# Altium PCB PCB1.PcbDoc
Units mm, origin at the board's own origin, x right, y up, seen from the top; angles counter-clockwise.
Board outline 128.4 x 73.28 mm, 2 copper layers (Top Layer, Bottom Layer); 38 components, 48 nets, 144 pads, 2 vias.
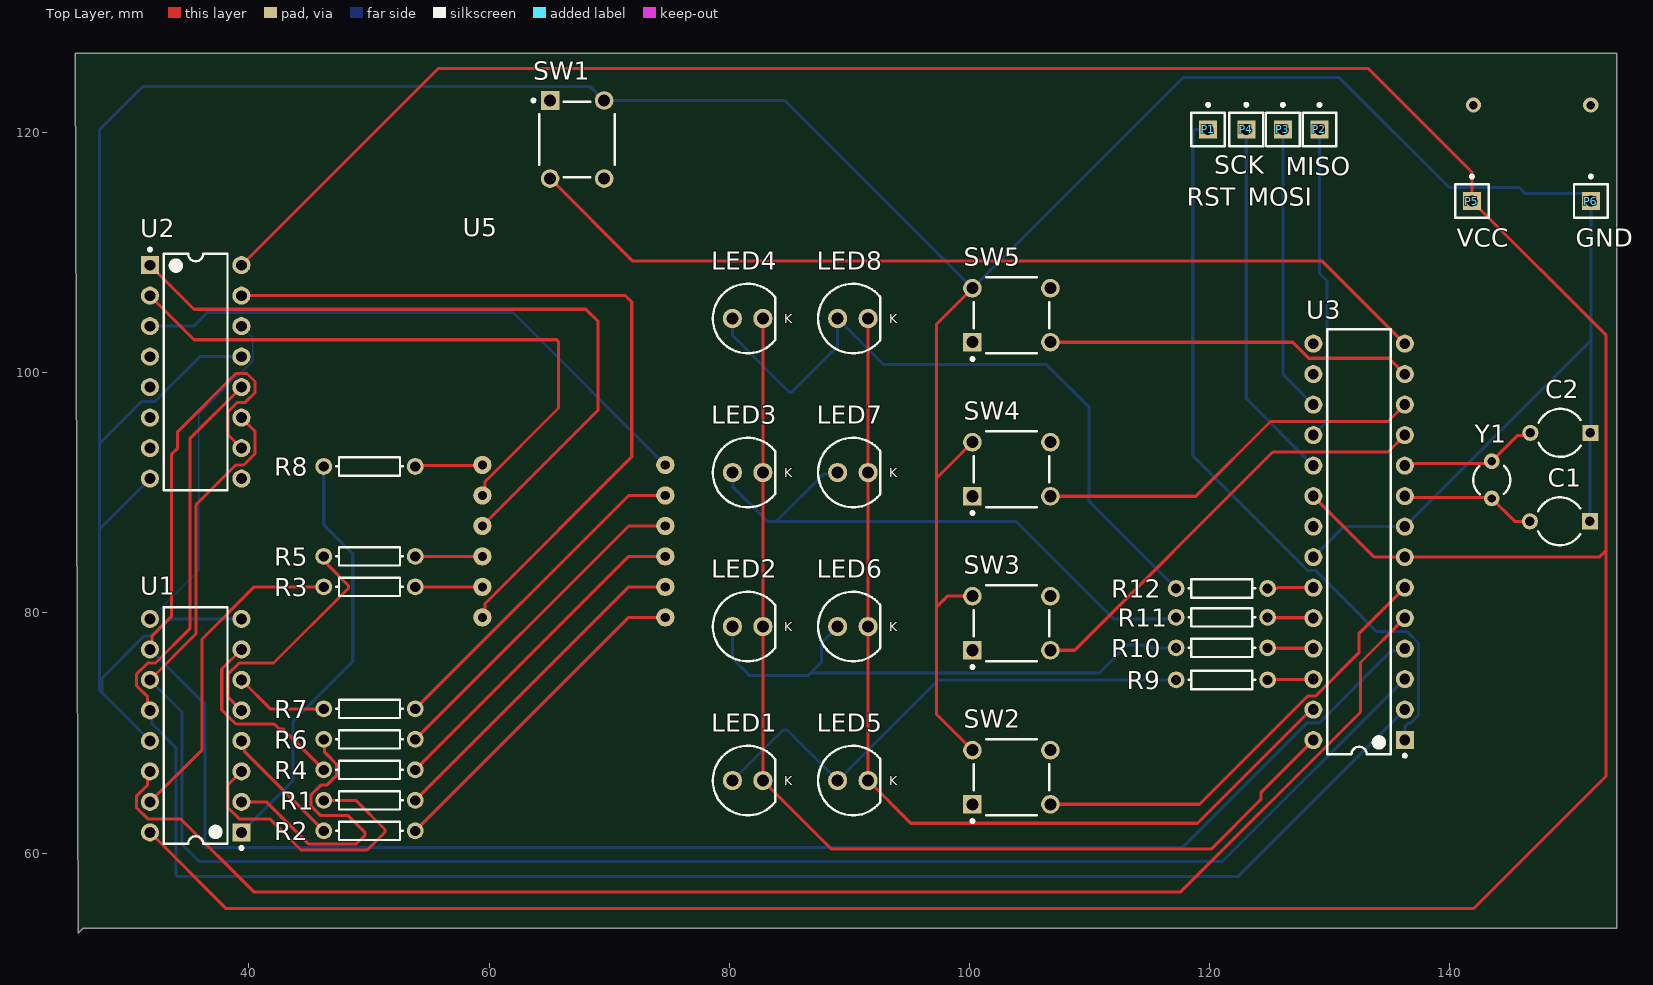
[diagram p0: Top Layer view]
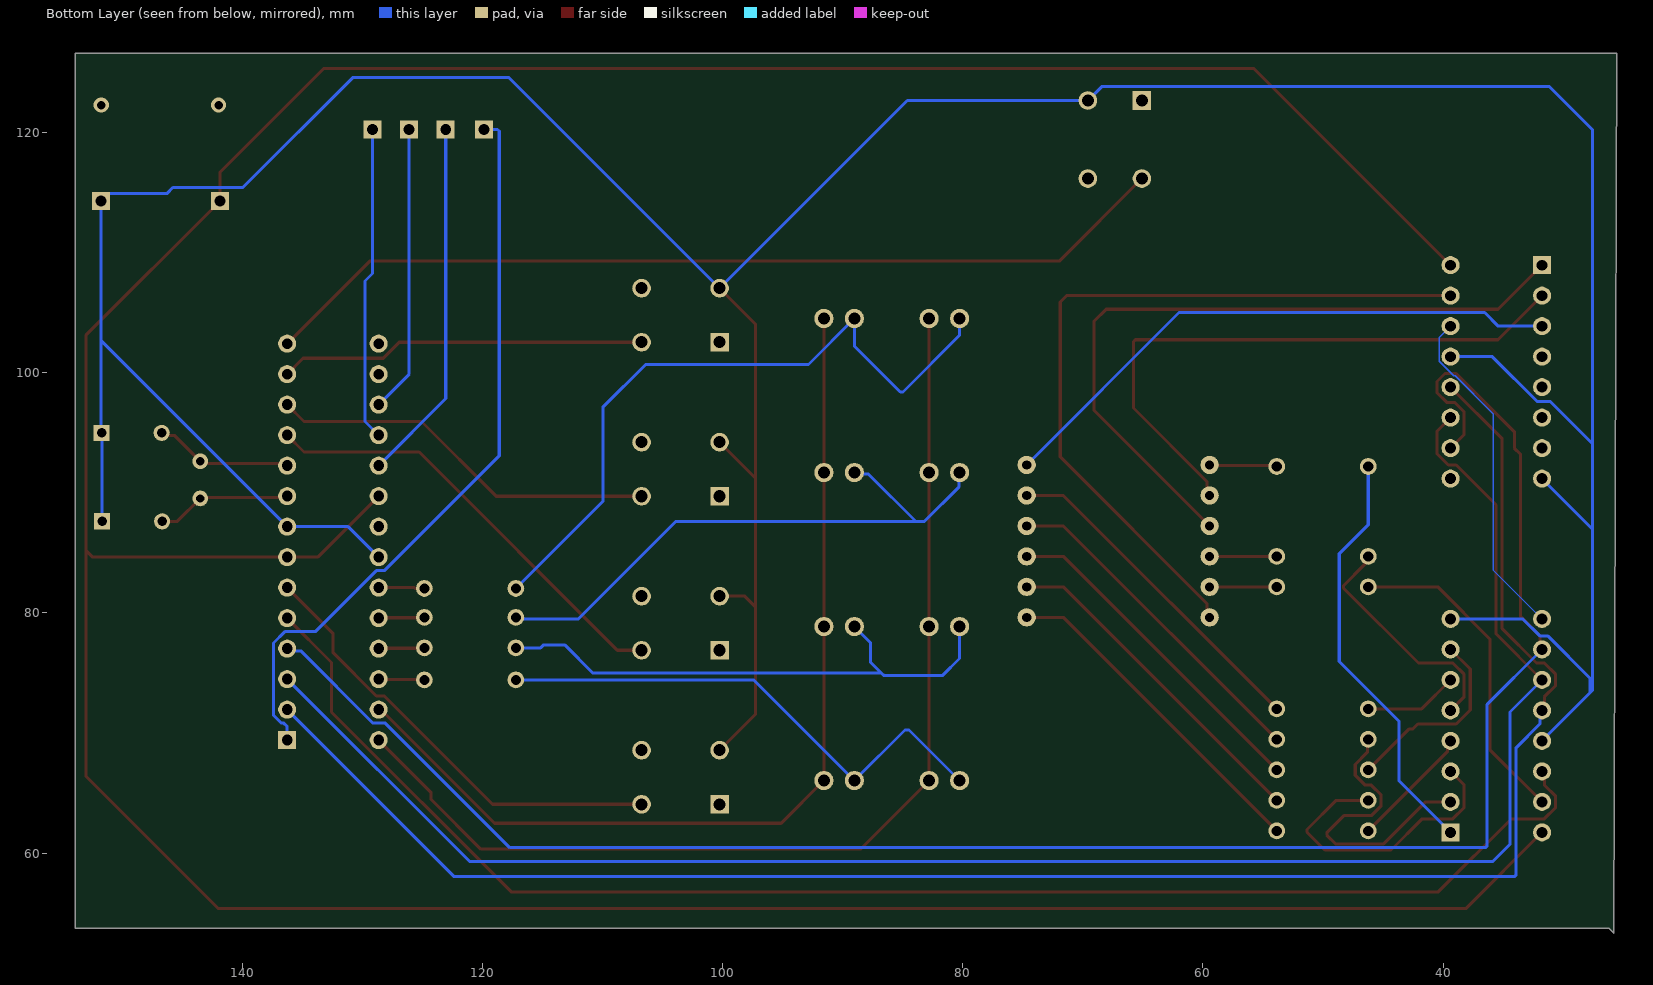
[diagram p1: Bottom Layer view, seen from below]

## Layer stack, top to bottom
Top Solder: solder mask 0.0102, Solder Resist, Dk 3.5
Top Layer: signal copper 0.0356
Dielectric 1: dielectric 0.32, FR-4, Dk 4.8
Bottom Layer: signal copper 0.0356
Bottom Solder: solder mask 0.0102, Solder Resist, Dk 3.5

## Board outline
25.527,126.619 153.924,126.619 153.924,53.721 26.162,53.721 25.781,53.34

## Design rules (kind name [scope] priority, off if disabled: settings)
BoardOutlineClearance [All] p1: gap=0.2 ignorepadtopadclearanceinfootprint=FALSE
Clearance [All] p1: gap=0.127 ignorepadtopadclearanceinfootprint=FALSE except(0.25: Arc-Hole Track-Hole SMDPad-Hole THPad-Hole Via-Hole Fill-Hole Poly-Hole Region-Hole Text-Hole)
ComponentClearance [All] p1: gap=0.127 collisioncheckmode=3 verticalgap=0.127 showdistances=TRUE
DiffPairsRouting [All] p1: maxlimit=0.254 minlimit=0.127 mostfreqgap=0.127 toplayer_minwidth=0.127 toplayer_maxwidth=25.4 toplayer_prefwidth=0.127 bottomlayer_minwidth=0.127 bottomlayer_maxwidth=25.4 bottomlayer_prefwidth=0.127 maxuncoupledlength=12.7
Height [All] p1: minheight=0 maxheight=1816.048 prefheight=12.7
HoleSize [All] p1: absolutevalues=TRUE maxlimit=6.3 minlimit=0.3 maxpercent=80.000 minpercent=20.000
HoleToHoleClearance [All] p1: gap=0.25 allowstackedmicrovias=FALSE
MinimumAnnularRing [All] p1: minimumring=0.076
MinimumSolderMaskSliver [All] p1: minsoldermaskwidth=0
PlaneClearance [All] p1: clearance=0.127
PlaneConnect PlaneConnectPowerPads [InPadClass('PowerPads')] p1: planeconnectstyle=Direct reliefexpansion=0.508 reliefentries=4 reliefconductorwidth=0.254 reliefairgap=0.254
PlaneConnect [All] p2: pad.planeconnectstyle=Relief pad.reliefexpansion=0.3 pad.reliefentries=4 pad.reliefconductorwidth=0.127 pad.reliefairgap=0.127 via.planeconnectstyle=Direct via.reliefexpansion=0.3 via.reliefentries=4 via.reliefconductorwidth=0.127 via.reliefairgap=0.127
PolygonConnect PolygonConnectPowerPads [All vs (InPadClass('PowerPads'))] p1: connectstyle=Direct reliefconductorwidth=0.254 reliefentries=4 polygonreliefangle="90 Angle" airgapwidth=0.254
PolygonConnect [All] p2: thpad.connectstyle=Relief thpad.reliefconductorwidth=0.127 thpad.reliefentries=4 thpad.polygonreliefangle="90 Angle" thpad.airgapwidth=0.127 smdpad.connectstyle=Relief smdpad.reliefconductorwidth=0.127 smdpad.reliefentries=4 smdpad.polygonreliefangle="90 Angle" smdpad.airgapwidth=0.127 via.connectstyle=Direct via.reliefconductorwidth=0.127 via.reliefentries=4 via.polygonreliefangle="90 Angle" via.airgapwidth=0.127
RoomDefinition guess_the_number [InComponentClass('guess_the_number')] p1: confinementstyle=ConfineIn formatcopy=TRUE lockcomponents=FALSE outline 0,0 50.8,0 50.8,25.4 0,25.4
RoutingVias [All] p1: holewidth=0.3 width=0.6 viastyle="Through Hole" minholewidth=0.3 minwidth=0.6 maxholewidth=0.6 maxwidth=6.6
SilkToSilkClearance [All] p1: silktosilkclearance=0
SilkToSolderMaskClearance [IsPad] p1: minsilkscreentomaskgap=0.127 clearancetoexposedcopper=TRUE
SolderMaskExpansion [All] p1: expansion=0.075 istentingtop=FALSE
Width [All] p1: maxlimit=25.4 minlimit=0.127 preferedwidth=0.127 minimp=50.000000 maximp=50.000000 favimp=50.000000
20 further rules are at their usual default settings.

## Components (designator, comment, footprint, x,y, rotation, side; value= is the part's Value field where it differs from the comment)
C1 "Cap2" CAPR5-4X5 149.185,87.63 r180 top value=100pF
C2 "Cap2" CAPR5-4X5 149.225,94.996 r180 top value=100pF
LED1 "151051RS11000" "Type 5mm" 81.534,66.04 r0 top
LED2 "151051RS11000" "Type 5mm" 81.534,78.867 r0 top
LED3 "151051RS11000" "Type 5mm" 81.534,91.694 r0 top
LED4 "151051RS11000" "Type 5mm" 81.534,104.521 r0 top
LED5 "151051RS11000" "Type 5mm" 90.297,66.04 r0 top
LED6 "151051RS11000" "Type 5mm" 90.297,78.867 r0 top
LED7 "151051RS11000" "Type 5mm" 90.297,91.694 r0 top
LED8 "151051RS11000" "Type 5mm" 90.297,104.521 r0 top
P1 "RST" PIN1 119.888,120.269 r0 top
P2 "MISO" PIN1 129.159,120.269 r0 top
P3 "MOSI" PIN1 126.111,120.269 r0 top
P4 "SCK" PIN1 123.063,120.269 r0 top
P5 "VCC" PIN1 141.859,114.3 r0 top
P6 "GND" PIN1 151.765,114.3 r0 top
R1 "Res1" AXIAL-0.3 50.038,64.389 r0 top value=1K
R2 "Res1" AXIAL-0.3 50.038,61.849 r0 top value=1K
R3 "Res1" AXIAL-0.3 50.038,82.169 r180 top value=1K
R4 "Res1" AXIAL-0.3 50.038,66.929 r0 top value=1K
R5 "Res1" AXIAL-0.3 50.038,84.709 r180 top value=1K
R6 "Res1" AXIAL-0.3 50.038,69.469 r0 top value=1K
R7 "Res1" AXIAL-0.3 50.038,72.009 r0 top value=1K
R8 "Res1" AXIAL-0.3 50.038,92.202 r180 top value=1K
R9 "Res1" AXIAL-0.3 121.031,74.422 r180 top value=1K
R10 "Res1" AXIAL-0.3 121.031,77.089 r180 top value=1K
R11 "Res1" AXIAL-0.3 121.031,79.629 r180 top value=1K
R12 "Res1" AXIAL-0.3 121.031,82.042 r180 top value=1K
SW1 "EVQ-PAE09K" FP-EVQ-PAE09K-MFG 67.331,119.432 r0 top
SW2 "EVQ-PAE09K" FP-EVQ-PAE09K-MFG 103.505,66.315 r90 top
SW3 "EVQ-PAE09K" FP-EVQ-PAE09K-MFG 103.505,79.142 r90 top
SW4 "EVQ-PAE09K" FP-EVQ-PAE09K-MFG 103.505,91.969 r90 top
SW5 "EVQ-PAE09K" FP-EVQ-PAE09K-MFG 103.505,104.796 r90 top
U1 "SN74HC595N" N0016A 35.56,70.612 r180 top
U2 "SN74HC595N" N0016A 35.56,100.076 r0 top
U3 "ATmega8-16PU" 28P3 132.461,85.919 r180 top
U5 "4-digit 7-segment" PCBComponent_1 67.056,85.979 r90 top
Y1 "XTAL" R38 143.51,91.085 r0 top

## Footprints (in the part's own frame and the unit in brackets; to place one, negate y for a bottom-side part, rotate by r counter-clockwise, add the part's x,y. Pads: shape width x height; smd on the part's side, far side on the other; paste and mask are expansions set on the pad)
28P3 [mm] "28-Pin Plastic Dual In-Line Package (PDIP)"
  rect 1.5x1.5 hole 0.9: 1(-3.81,16.51)
  round 1.5 hole 0.9: 2(-3.81,13.97) 3(-3.81,11.43) 4(-3.81,8.89) 5(-3.81,6.35) 6(-3.81,3.81) 7(-3.81,1.27) 8(-3.81,-1.27) 9(-3.81,-3.81) 10(-3.81,-6.35) 11(-3.81,-8.89) 12(-3.81,-11.43) 13(-3.81,-13.97) 14(-3.81,-16.51) 15(3.81,-16.51) 16(3.81,-13.97) 17(3.81,-11.43) 18(3.81,-8.89) 19(3.81,-6.35) 20(3.81,-3.81) 21(3.81,-1.27) 22(3.81,1.27) 23(3.81,3.81) 24(3.81,6.35) 25(3.81,8.89) 26(3.81,11.43) 27(3.81,13.97) 28(3.81,16.51)
  silkscreen extent -3.94,-17.7 2.65,17.93, body extent -3.6,-17.65 3.6,17.65, height 4.58
AXIAL-0.3 [mm] "Axial Device, Thru-Hole; 2 Leads; 0.3 in Pin Spacing"
  round 1.4 hole 0.85: 1(-3.81,0) 2(3.81,0)
  silkscreen extent -2.77,-0.76 2.77,0.76
CAPR5-4X5 [mm] "Capacitor; 2 Leads"
  rect 1.35x1.35 hole 0.8: 1(-2.5,0)
  round 1.35 hole 0.8: 2(2.5,0)
  silkscreen extent -1.69,-2 1.82,2
FP-EVQ-PAE09K-MFG [mm]
  rect 1.55x1.55 hole 1 paste-1000 mask+0: A(-2.25,3.25)
  round 1.55 hole 1 paste-1000 mask+0: A'(-2.25,-3.25) B(2.25,3.25) B'(2.25,-3.25)
  silkscreen extent -3.77,-3.15 3.15,3.37, body extent -3.25,-4.13 3.25,4.13, height 0.25
N0016A [mm] "DIP, 16-Leads, Body 19.7x6.6mm, Pitch 2.54mm"
  rect 1.5x1.5 hole 0.9: 1(-3.81,8.89)
  round 1.5 hole 0.9: 2(-3.81,6.35) 3(-3.81,3.81) 4(-3.81,1.27) 5(-3.81,-1.27) 6(-3.81,-3.81) 7(-3.81,-6.35) 8(-3.81,-8.89) 9(3.81,-8.89) 10(3.81,-6.35) 11(3.81,-3.81) 12(3.81,-1.27) 13(3.81,1.27) 14(3.81,3.81) 15(3.81,6.35) 16(3.81,8.89)
  silkscreen extent -3.94,-9.85 2.65,10.31, body extent -3.95,-9.85 3.95,9.85, height 5.08
PCBComponent_1 [mil]
  round 60 hole 30: 0(-250,-300) 1(-150,-300) 2(-50,-300) 3(50,-300) 4(150,-300) 5(250,-300) 6(-250,300) 7(-150,300) 8(-50,300) 9(50,300) 10(150,300) 11(250,300)
  body extent -985,-375 970,375, height 315
PIN1 [mm] "Connector; Plug"
  rect 1.5x1.5 hole 0.9: 1(0,0)
  silkscreen extent -1.4,-1.4 1.4,2.17
R38 [mm] "Crystal, Thru-Hole; 2 Leads; Body 3.1 x 8.2 mm (Dia.xH)"
  round 1.3 hole 0.7: 1(0,1.55) 2(0,-1.55)
  silkscreen extent -1.55,-1.19 1.55,1.17
"Type 5mm" [mm] "THT, LED-5mm, 2pin- Body 5.8mm"
  round 1.6 hole 1: 1(1.27,0) 2(-1.27,0)
  silkscreen extent -2.9,-2.9 2.29,2.9, body extent -2.9,-2.9 2.5,2.9, height 11.7

## Part data
C1 C2: "Capacitor", PackageDescription="Capacitor; 2 Leads", PackageReference=CAPR5-4X5, Published=23-Sep-2002, Publisher="Altium Limited"
LED1 LED2 LED3 LED4 LED5 LED6 LED7 LED8: library part CMP-1488-00008-1, "THT LED round mono-color color lens, WL-TMRW, Red", Emitting color=Red, Manufacturer="Wuerth Elektronik", ComponentLink1Description="Manufacturer URL", ComponentLink1URL=http://www.we-online.com, ComponentLink2Description=Datasheet, ComponentLink2URL=http://katalog.we-online.de/pbs/datasheet/7448042001.pdfhttp://katalog.we-online.de/pbs/datasheet/7448042001.pdfhttp://katalog.we-online.de/pbs/datasheet/7448042001.pdfhttp://katalog.we-online.de/pbs/datasheet/151051RS11000.pdf, PackageReference="Type 5mm", PartNumber=151051RS11000
P1 P2 P3 P4 P5 P6: library part Plug, "Plug", LatestRevisionDate=17-Jul-2002, LatestRevisionNote="Re-released for DXP Platform.", Publisher="Altium Limited"
R1 R2 R3 R4 R5 R6 R7 R8 R9 R10 R11 R12: "Resistor", LatestRevisionDate=17-Jul-2002, LatestRevisionNote="Re-released for DXP Platform.", PackageDescription="Axial Device, Thru-Hole; 2 Leads; 0.3 in Pin Spacing", PackageReference=AXIAL-0.3, Published=8-Jun-2000, Publisher="Altium Limited"
SW1 SW2 SW3 SW4 SW5: library part CMP-05618-000085-1, "SWITCH TACTILE SPST-NO 0.02A 15V", Actuator Color=Black, Contact Current Rating=20mA, Contact Resistance=50mR, Max Operating Temperature=70°C, Max Voltage Rating (DC)=15V, Min Operating Temperature=-20°C, Operating Force=1.6N, Package Quantity=500, Actuator Length=5.6mm, Actuator Type=Standard, Color=Black, Contact Plating=Gold, Current Rating=20mA, Depth=7.8mm, Electrical Life=100000Cycles, Height=9.5mm, Illumination Type=Non-Illuminated, Lead Free="Lead Free", Length=6mm, Max Current Rating=20mA, Mechanical Life=100000Cycles, Mount="Through Hole", Orientation=Straight, Packaging=Bulk, Radiation Hardening=No, RoHS Compliant=Yes, Series=EVQPA, Size=6mm, Switch Function=Off-Mom, Switch Travel=0.25mm, Termination="PC Pin", Throw Configuration=SPST, Voltage Rating (DC)=15V, Width=6mm
U1 U2: library part CMP-0780-00137-3, "8-Bit Shift Registers With 3-State Output Registers, N0016A, TUBE", F @ Nom Voltage(Max)(Mhz)=28, Generic Part Number=SN74HC595, ICC @ Nom Voltage(Max)(mA)=0.08, Manufacturer="Texas Instruments", Operating Temperature Range(C)="-40 to 85", Rating=Military, tpd @ Nom Voltage(Max)(ns)=34, Voltage(Nom)(V)=6, 3-State Output=Yes, Bits=8, Code_JEDEC=MS-001, DatasheetVersion=SCLS041H, Input Type=CMOS, Output Drive (IOL/IOH)(Max)(mA)=7.8/-7.8, Output Type=CMOS, PackageReference=N0016A, PackageVersion=http://www.ti.com/lit/ml/mpdi002c/mpdi002c.pdf, Technology Family=HC, VCC(Max)(V)=6, VCC(Min)(V)=2
U3: library part CMP-0095-00372-1, "8-bit AVR Microcontroller, 4.5-5.5V, 16MHz, 8KB Flash, 512 Bytes EEPROM, 1KB SRAM, 28-pin PDIP, Industrial Grade (-40°C to 85°C)", ComponentLink1Description="Manufacturer URL", ComponentLink1URL=http://www.atmel.com/, ComponentLink2Description=ATmega8(L), ComponentLink2URL=http://www.atmel.com/dyn/resources/prod_documents/doc2486.pdf, ComponentLink3Description="ATmega8(L) Summary", ComponentLink3URL=http://www.atmel.com/dyn/resources/prod_documents/2486S.pdf, DatasheetVersion="revZ, Feb-2011", PackageDescription="28-lead (0.300\"/7.62mm Wide) Plastic Dual Inline Package (PDIP)", PackageReference=28P3, PackageVersion="revB, Sep-2001"
Y1: "Crystal Oscillator", LatestRevisionDate=17-Jul-2002, LatestRevisionNote="Re-released for DXP Platform.", PackageDescription="Crystal, Thru-Hole; 2 Leads; Body 3.1 x 8.2 mm (Dia.xH)", PackageReference=R38, Published=8-Jun-2000, Publisher="Altium Limited"

## Via types
v1: diameter 1.27, hole 0.711, Top Layer to Bottom Layer, 2 vias

## Nets (pads, with @x,y where several pads share a name; then routed paths per layer and width w, separated by ;. In a path a pad name is that pad's centre, name@x,y a point inside that pad or via, vN(x,y) a via of type N, cw(c..) or ccw(c..) an arc to the next point about the centre after c; other vN are vias at no path point)
GND: C1.1 C2.1 P6.1 SW1.B SW2.B SW3.B SW4.B SW5.B U1.8 U1.13 U2.8 U2.13 U3.8 U3.22 | length 338.2
  Top Layer w0.254: SW2.B 97.282,71.538 97.282,80.518 ; SW3.B 98.156,81.392 97.282,80.518 ; SW4.B 97.282,91.246 ; SW5.B 97.282,104.073 97.282,91.246 ; 97.282,80.518 97.282,91.246
  Bottom Layer w0.254: U1.13 27.749,73.343 ; U2.8 27.559,86.995 ; U1.8 33.349,79.502 31.94,78.093 31.282,78.093 27.749,74.561 27.749,73.343 ; U2.13 35.889,101.346 32.151,97.607 31.059,97.607 27.559,94.107 ; U3.22 131.191,87.189 U3.8 151.765,102.683 ; C1.1 151.685,94.956 C2.1 151.765,95.036 151.765,102.683 ; 27.559,86.995 27.559,73.533 27.749,73.343 ; 27.559,86.995 27.559,94.107 ; 27.559,94.107 27.559,120.269 31.128,123.838 68.425,123.838 SW1.B 84.619,122.682 SW5.B 117.796,124.587 130.81,124.587 139.966,115.431 145.793,115.431 146.301,114.923 151.142,114.923 P6.1 151.765,102.683
NetC1_2: C1.2 U3.9 Y1.2 | length 11.3
  Top Layer w0.254: U3.9 136.368,89.632 143.413,89.632 Y1.2 145.415,87.63 C1.2
NetC2_2: C2.2 U3.10 Y1.1 | length 11.6
  Top Layer w0.254: U3.10 136.454,92.452 143.327,92.452 Y1.1 145.669,94.794 146.523,94.794 C2.2
NetLED1_1: LED1.1 LED2.1 LED3.1 LED4.1 U3.28 | length 90.8
  Top Layer w0.254: LED4.1 LED3.1 LED2.1 LED1.1 88.519,60.325 120.142,60.325 124.277,64.46 124.277,65.035 U3.28
NetLED1_2: LED1.2 LED5.2 R9.2 | length 43.9
  Bottom Layer w0.254: LED1.2 84.477,70.253 84.814,70.253 LED5.2 97.409,74.422 R9.2
NetLED2_2: LED2.2 LED6.2 R10.2 | length 46.1
  Bottom Layer w0.254: LED2.2 80.264,76.2 81.661,74.803 86.592,74.803 86.794,75.004 ; LED6.2 87.681,77.521 87.681,75.892 86.794,75.004 ; R10.2 115.161,77.089 114.907,77.343 113.157,77.343 110.818,75.004 86.794,75.004
NetLED3_2: LED3.2 LED7.2 R11.2 | length 49.6
  Bottom Layer w0.254: LED3.2 80.302,91.656 80.302,90.513 83.207,87.608 83.892,87.608 ; LED7.2 88.895,91.562 87.846,91.562 83.892,87.608 ; R11.2 117.094,79.502 112.014,79.502 103.908,87.608 83.892,87.608
NetLED4_2: LED4.2 LED8.2 R12.2 | length 58.1
  Bottom Layer w0.254: LED4.2 80.264,103.124 84.985,98.403 85.195,98.403 89.027,102.235 LED8.2 92.85,100.698 106.417,100.698 109.982,97.133 109.982,89.281 R12.2
NetLED5_1: LED5.1 LED6.1 LED7.1 LED8.1 U3.27 | length 81
  Top Layer w0.254: LED8.1 LED7.1 LED6.1 LED5.1 95.123,62.484 118.999,62.484 128.464,71.949 U3.27
NetP1_1: P1.1 U3.1 | length 62.3
  Bottom Layer w0.254: P1.1 118.757,120.269 118.608,120.12 118.608,93.092 128.183,83.518 128.841,83.518 133.921,78.438 136.461,78.438 137.402,77.497 137.402,71.48 136.739,70.818 136.549,70.818 136.271,70.54 U3.1
NetP2_1: P2.1 U3.18 | length 26.2
  Bottom Layer w0.254: U3.18 129.782,95.94 129.782,107.65 129.159,108.273 P2.1
NetP3_1: P3.1 U3.17 | length 24
  Bottom Layer w0.254: P3.1 126.111,99.889 U3.17
NetP4_1: P4.1 U3.19 | length 30.3
  Bottom Layer w0.254: P4.1 123.063,97.857 U3.19
NetR1_1: R1.1 U1.3 | length 25
  Top Layer w0.254: U1.3 38.239,65.671 38.239,63.794 39.18,62.853 41.736,62.853 44.329,60.26 49.846,60.26 51.33,61.744 51.33,61.954 48.895,64.389 R1.1
NetR1_2: R1.2 U5.1 | length 28.2
  Top Layer w0.254: R1.2 71.628,82.169 U5.1
NetR2_1: R2.1 U1.4 | length 10.3
  Top Layer w0.254: U1.4 39.608,69.104 39.608,68.469 R2.1
NetR2_2: R2.2 U5.0 | length 28.2
  Top Layer w0.254: R2.2 71.628,79.629 U5.0
NetR3_1: R3.1 U5.7 | length 5.6
  Top Layer w0.254: R3.1 U5.7
NetR3_2: R3.2 U1.15 | length 27.3
  Top Layer w0.254: U1.15 36.103,68.615 36.103,77.835 40.438,82.169 R3.2
NetR4_1: R4.1 U1.7 | length 16.3
  Top Layer w0.254: U1.7 37.731,75.323 37.731,71.922 38.902,70.751 42.1,70.751 42.503,70.348 42.809,70.348 R4.1
NetR4_2: R4.2 U5.2 | length 28.2
  Top Layer w0.254: R4.2 71.628,84.709 U5.2
NetR5_1: R5.1 U5.8 | length 5.6
  Top Layer w0.254: R5.1 U5.8
NetR5_2: R5.2 U1.5 | length 20
  Top Layer w0.254: U1.5 38.239,73.013 38.239,74.89 39.18,75.831 42.049,75.831 48.282,82.064 48.282,82.274 46.548,84.008 46.548,84.079 46.228,84.399 R5.2
NetR6_1: R6.1 U1.2 | length 24.9
  Top Layer w0.254: U1.2 41.444,64.262 44.938,60.768 48.957,60.768 49.679,61.49 49.679,61.7 48.26,63.119 45.969,63.119 45.147,63.941 45.147,64.837 45.969,65.659 46.487,65.659 47.309,66.481 47.309,67.377 46.298,68.388 46.298,69.399 R6.1
NetR6_2: R6.2 U5.3 | length 28.2
  Top Layer w0.254: R6.2 71.628,87.249 U5.3
NetR7_1: R7.1 U1.6 | length 7.9
  Top Layer w0.254: U1.6 41.783,72.009 R7.1
NetR7_2: R7.2 U5.4 | length 28.2
  Top Layer w0.254: R7.2 71.628,89.789 U5.4
NetR8_1: R8.1 U5.11 | length 5.6
  Top Layer w0.254: R8.1 53.911,92.266 59.372,92.266 U5.11
NetR8_2: R8.2 U1.1 | length 35.3
  Bottom Layer w0.254: U1.1 43.651,66.003 43.651,70.961 48.641,75.951 48.641,84.934 46.228,87.347 R8.2
NetR9_1: R9.1 U3.26 | length 3.8
  Top Layer w0.254: R9.1 124.874,74.455 128.618,74.455 U3.26
NetR10_1: R10.1 U3.25 | length 3.8
  Top Layer w0.254: R10.1 124.871,77.059 128.621,77.059 U3.25
NetR11_1: R11.1 U3.24 | length 3.8
  Top Layer w0.254: R11.1 124.871,79.599 128.621,79.599 U3.24
NetR12_1: R12.1 U3.23 | length 3.8
  Top Layer w0.254: R12.1 125.603,82.042 125.67,82.109 U3.23
NetSW1_A': SW1.A' U3.14 | length 76.9
  Top Layer w0.254: SW1.A' 71.963,109.3 129.399,109.3 U3.14
NetSW2_A': SW2.A' U3.6 | length 37.9
  Top Layer w0.254: SW2.A' 119.168,64.065 128.183,73.08 128.841,73.08 132.437,76.675 132.437,78.275 U3.6
NetSW3_A': SW3.A' U3.11 | length 36.9
  Top Layer w0.254: SW3.A' 108.769,76.892 125.277,93.4 134.862,93.4 U3.11
NetSW4_A': SW4.A' U3.12 | length 32.7
  Top Layer w0.254: SW4.A' 118.864,89.719 125.084,95.94 134.862,95.94 U3.12
NetSW5_A': SW5.A' U3.13 | length 30.6
  Top Layer w0.254: SW5.A' 126.934,102.546 128.268,101.212 134.947,101.212 U3.13
NetU1_9: U1.9 U2.14 | length 28.4
  Bottom Layer w0.127: U1.9 35.826,83.578 35.826,96.592 38.98,99.747 39.101,99.747 40.311,100.956 40.311,102.945 U2.14
NetU1_10: U1.10 U2.10 U3.4 | length 160.3
  Top Layer w0.254: U1.10 31.94,77.152 31.94,78.093 33.528,79.681 33.528,93.196 34.058,93.726 34.058,95.093 38.902,99.937 39.838,99.937 40.501,99.274 40.501,98.338 39.699,97.536 39.041,97.536 38.239,96.734 38.239,94.857 U2.10
  Bottom Layer w0.254: U1.10 36.322,72.39 36.322,60.601 36.471,60.452 117.729,60.452 128.095,70.818 129.119,70.818 135.14,76.838 136.081,76.838 U3.4
NetU1_11: U1.11 U2.11 U3.3 | length 149.9
  Top Layer w0.254: U1.11 35.584,78.256 35.584,88.999 38.902,92.317 39.56,92.317 40.501,93.258 40.501,95.135 U2.11
  Bottom Layer w0.254: U1.11 34.417,71.755 34.417,60.728 35.836,59.309 121.091,59.309 U3.3
NetU1_12: U1.12 U2.12 U3.2 | length 154.2
  Top Layer w0.254: U1.12 31.56,72.072 31.56,73.013 30.619,73.954 30.619,74.89 31.56,75.831 32.218,75.831 35.076,78.688 35.076,94.512 U2.12
  Bottom Layer w0.254: U1.12 31.94,71.692 31.94,70.751 33.909,68.782 33.909,58.188 34.058,58.039 122.361,58.039 U3.2
NetU1_14: U1.14 U3.5 | length 123.9
  Top Layer w0.254: U1.14 31.56,66.612 31.56,65.671 30.619,64.73 30.619,63.794 31.56,62.853 34.302,62.853 40.386,56.769 117.611,56.769 132.576,71.734 132.576,75.874 U3.5
NetU2_1: U2.1 U5.9 | length 60.3
  Top Layer w0.254: U2.1 35.421,105.295 68.06,105.295 69.088,104.267 69.088,96.901 U5.9
NetU2_2: U2.2 U5.10 | length 51.1
  Top Layer w0.254: U2.2 35.421,102.755 65.625,102.755 65.786,102.594 65.786,97.063 59.655,90.932 59.655,90.008 U5.10
NetU2_3: U2.3 U5.5 | length 48.7
  Bottom Layer w0.254: U2.3 35.397,103.886 36.528,105.017 61.988,105.017 U5.5
NetU2_15: U2.15 U5.6 | length 64.2
  Top Layer w0.254: U2.15 71.352,106.426 71.882,105.896 71.882,92.999 59.655,80.772 59.655,79.848 U5.6
VCC: P5.1 U1.16 U2.16 U3.7 U3.20 | length 323
  Top Layer w0.254: U1.16 38.1,55.372 141.986,55.372 153.035,66.421 153.035,85.217 ; U2.16 55.753,125.349 133.223,125.349 141.859,116.713 P5.1 153.035,103.124 153.035,85.217 ; U3.20 133.731,84.649 U3.7 152.467,84.649 153.035,85.217
pads on no net: SW1.A SW1.B' SW2.A SW2.B' SW3.A SW3.B' SW4.A SW4.B' SW5.A SW5.B' U2.4 U2.5 U2.6 U2.7 U2.9 U3.15 U3.16 U3.21
copper on no net:
  other v1: 141.986,122.301 151.765,122.301

## Text inside footprints (layer, text, board x,y; h text height)
LED1: Top Overlay "K" at 84.582,65.659 h0.76; Mechanical 15 "K" at 84.582,65.659 h0.76
LED2: Top Overlay "K" at 84.582,78.486 h0.76; Mechanical 15 "K" at 84.582,78.486 h0.76
LED3: Top Overlay "K" at 84.582,91.313 h0.76; Mechanical 15 "K" at 84.582,91.313 h0.76
LED4: Top Overlay "K" at 84.582,104.14 h0.76; Mechanical 15 "K" at 84.582,104.14 h0.76
LED5: Top Overlay "K" at 93.345,65.659 h0.76; Mechanical 15 "K" at 93.345,65.659 h0.76
LED6: Top Overlay "K" at 93.345,78.486 h0.76; Mechanical 15 "K" at 93.345,78.486 h0.76
LED7: Top Overlay "K" at 93.345,91.313 h0.76; Mechanical 15 "K" at 93.345,91.313 h0.76
LED8: Top Overlay "K" at 93.345,104.14 h0.76; Mechanical 15 "K" at 93.345,104.14 h0.76
U5: Mechanical 1 "0" at 73.533,77.343 h1.52 r90